# Altium PCB pcb.PcbDoc
Units mm, origin at the board's own origin, x right, y up, seen from the top; angles counter-clockwise.
Board outline 109.47 x 53.98 mm, 2 copper layers (Top Layer, Bottom Layer); 19 components, 21 nets, 91 pads, 5 vias.
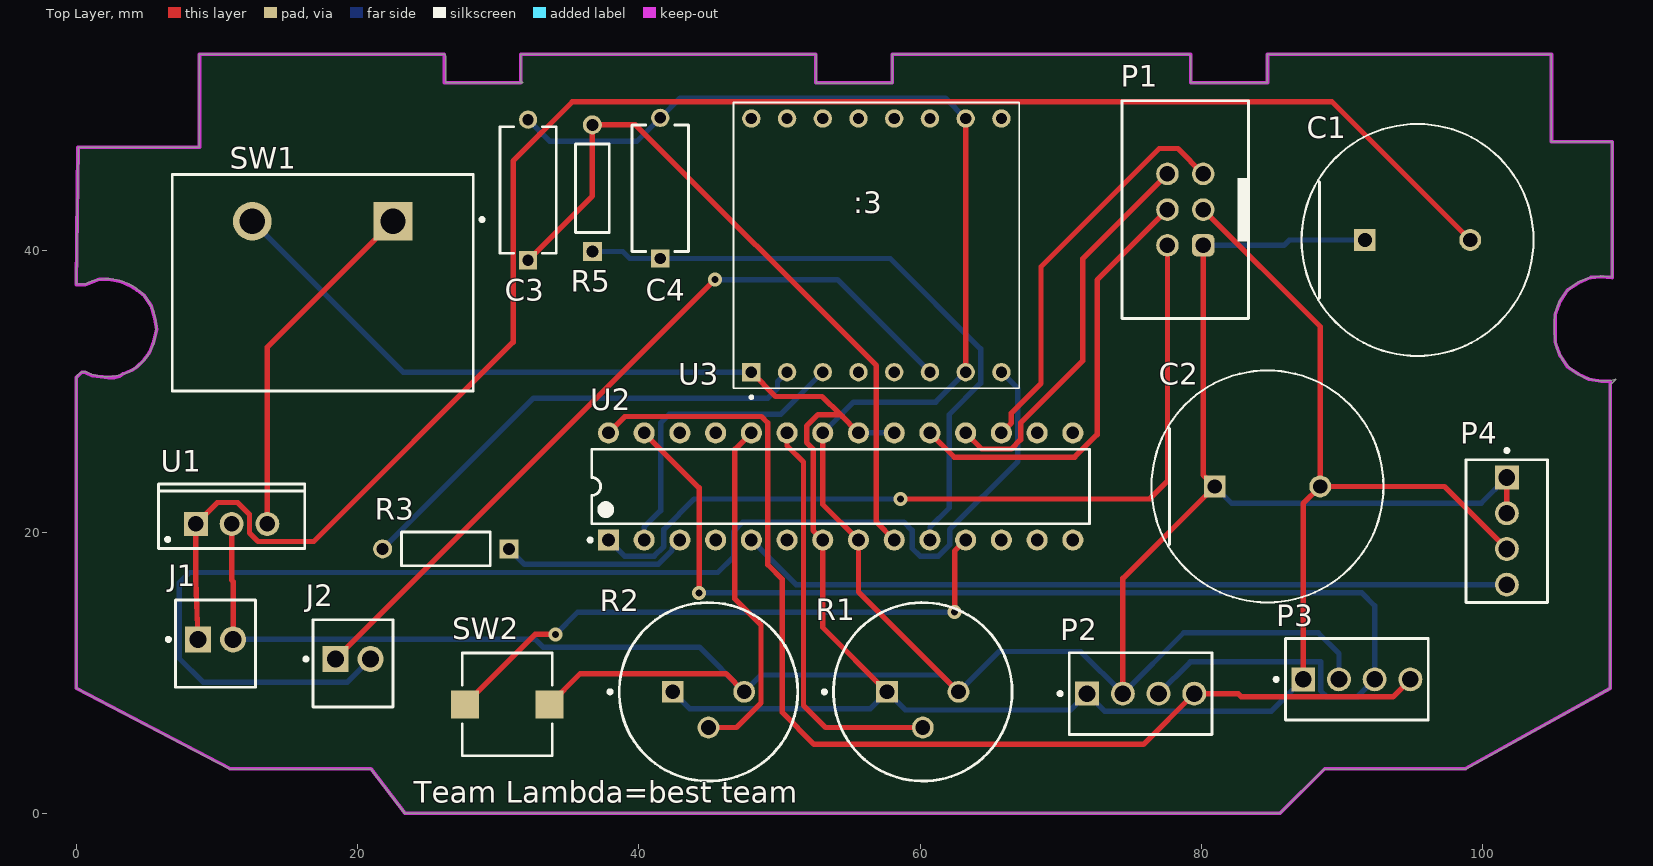
[diagram p0: Top Layer view]
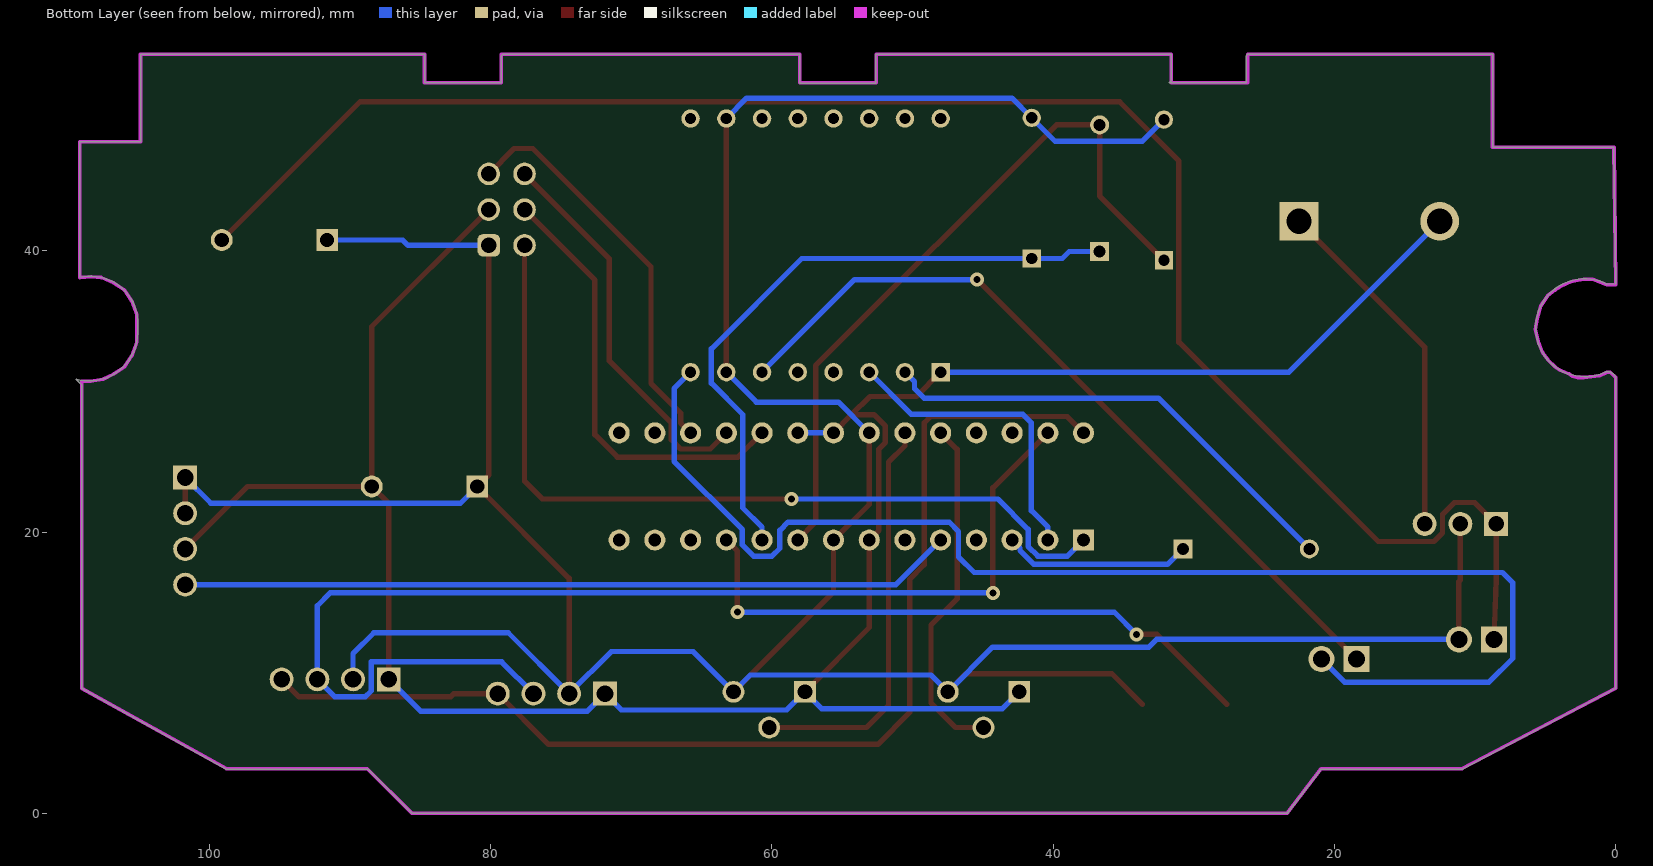
[diagram p1: Bottom Layer view, seen from below]
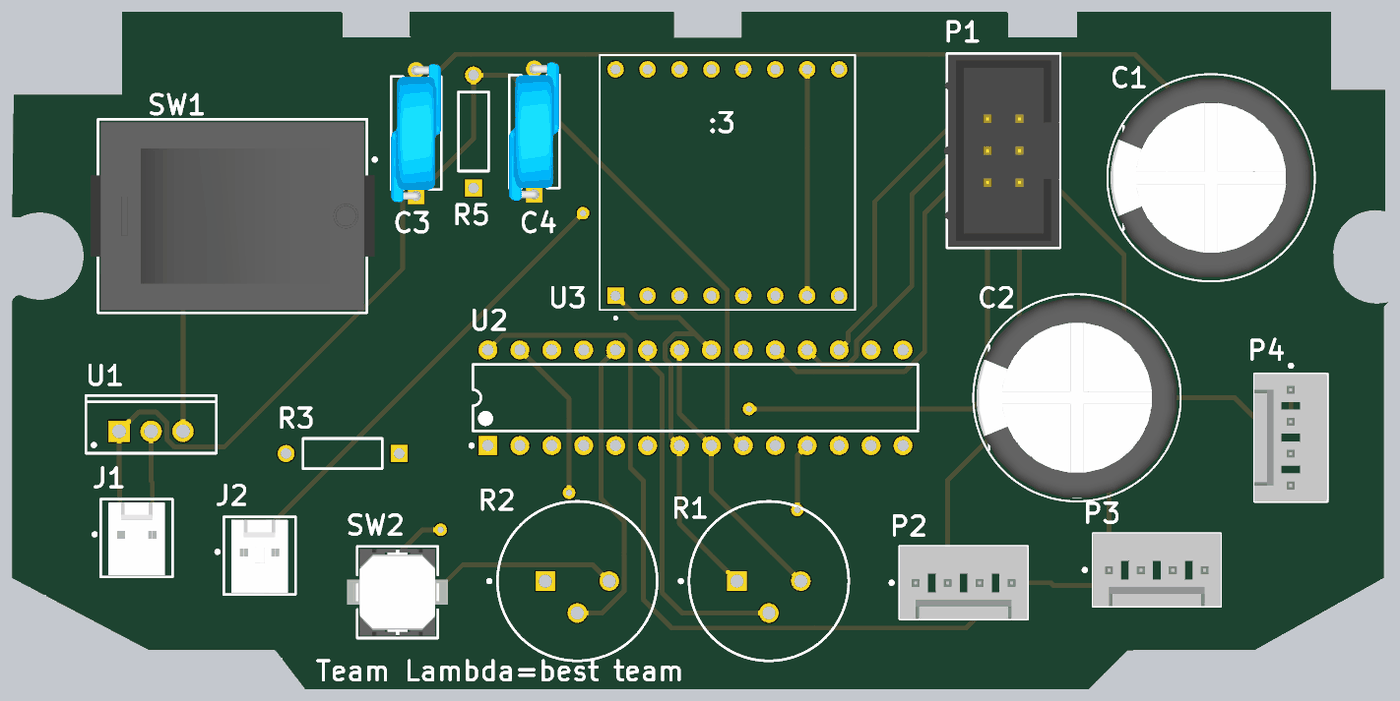
[diagram p2: 3D render of the assembled board from above, using the file's embedded part models]

## Layer stack, top to bottom
Top Solder: solder mask 0.0102, Solder Resist, Dk 3.5
Top Layer: signal copper 0.0356
Dielectric 1: dielectric 0.32, FR-4, Dk 4.8
Bottom Layer: signal copper 0.0356
Bottom Solder: solder mask 0.0102, Solder Resist, Dk 3.5

## Board outline
8.763,47.371 8.763,53.975 26.162,53.975 26.289,53.848 26.289,51.943 31.75,51.943 31.623,52.07 31.623,53.975 52.578,53.975 52.632,53.921 52.632,51.895 57.991,51.895 58.039,51.943 58.039,53.975 79.121,53.975 79.248,53.848 79.248,51.943 84.709,51.943 84.709,53.975 104.902,53.975 104.902,47.752 109.22,47.752 109.22,38.1 ccw(c108.454,34.828) 105.115,34.458 ccw(c108.566,34.201) 109.474,30.861 109.22,30.607 109.093,30.48 109.093,8.89 98.806,3.134 88.732,3.134 85.598,0 23.351,0 20.955,3.134 10.922,3.134 0,8.89 0,29.972 0,30.861 cw(c0.569,30.822) 0.8,31.343 ccw(c2.211,34.524) 0.644,37.631 0.008,37.64 0.127,47.371

## Design rules (kind name [scope] priority, off if disabled: settings)
BoardOutlineClearance [All] p1: gap=0.2 ignorepadtopadclearanceinfootprint=FALSE except(0.4: Arc-SplitBarrior Arc-SplitContinuation Track-SplitBarrior Track-SplitContinuation SMDPad-SplitBarrior SMDPad-SplitContinuation THPad-SplitBarrior THPad-SplitContinuation Via-SplitBarrior Via-SplitContinuation Fill-SplitBarrior Fill-SplitContinuation Poly-SplitBarrior Poly-SplitContinuation Region-SplitBarrior Region-SplitContinuation Text-SplitBarrior Text-SplitContinuation)
Clearance "Clearance Bottom Layer" [OnLayer('Bottom Layer')] p1: gap=0.203 ignorepadtopadclearanceinfootprint=TRUE except(0.254: Arc-Text Track-Text SMDPad-Text THPad-Text Via-Text Fill-Text Poly-Text Region-Text Text-Text)
Clearance "Clearance Top Layer" [OnLayer('Top Layer')] p2: gap=0.203 ignorepadtopadclearanceinfootprint=TRUE except(0.254: Arc-Text Track-Text SMDPad-Text THPad-Text Via-Text Fill-Text Poly-Text Region-Text Text-Text)
Clearance [All] p3: gap=0.2 ignorepadtopadclearanceinfootprint=FALSE except(0.089: Arc-Arc Arc-Track Arc-SMDPad Track-Track Track-SMDPad SMDPad-SMDPad; 0.127: Arc-Via Track-Via SMDPad-Via THPad-Via Via-Via; 0.254: Arc-Text Track-Text SMDPad-Text THPad-Text Via-Text Fill-Text Poly-Text Region-Text Text-Text)
HoleSize [All] p1: absolutevalues=TRUE maxlimit=6.3 minlimit=0.2 maxpercent=80.000 minpercent=20.000
MinimumAnnularRing [All] p1: minimumring=0.076
MinimumSolderMaskSliver [All] p1: minsoldermaskwidth=0.1
PolygonConnect PolygonConnect_1 [All] p1: thpad.connectstyle=Relief thpad.reliefconductorwidth=0.508 thpad.reliefentries=4 thpad.polygonreliefangle="90 Angle" thpad.airgapwidth=0.254 smdpad.connectstyle=Relief smdpad.reliefconductorwidth=0.508 smdpad.reliefentries=4 smdpad.polygonreliefangle="90 Angle" smdpad.airgapwidth=0.254 via.connectstyle=Direct via.reliefconductorwidth=0.508 via.reliefentries=4 via.polygonreliefangle="90 Angle" via.airgapwidth=0.254
RoutingCorners [All] p1: cornerstyle=Round minsetback=2.54 maxsetback=2.54
RoutingVias [All] p1: holewidth=0.5 width=1 viastyle="Through Hole" minholewidth=0.2 minwidth=0.45 maxholewidth=1 maxwidth=2
SilkToSilkClearance [All] p1: silktosilkclearance=0.1
SilkToSolderMaskClearance [IsPad] p1: minsilkscreentomaskgap=0.1 clearancetoexposedcopper=TRUE
SolderMaskExpansion [All] p1: expansion=0.102 istentingtop=FALSE
Width [All] p1: maxlimit=2.54 minlimit=0.089 preferedwidth=0.381
25 further rules are at their usual default settings.

## Components (designator, comment, footprint, x,y, rotation, side; value= is the part's Value field where it differs from the comment)
C1 "10uF" FP-RAD-TH-D_16_0_5-L_15_1-MFG 95.377,40.767 r0 top
C2 "10uF" FP-RAD-TH-D_16_0_5-L_15_1-MFG 84.709,23.241 r0 top
C3 "22 pF" FP-DE1_D9_T4_F10_d0_6-0_0-MFG 32.131,44.323 r90 top
C4 "22 pF" FP-DE1_D9_T4_F10_d0_6-0_0-MFG 41.529,44.45 r90 top
J1 "22-04-1021" FP-22-04-1021-MFG 9.906,12.065 r0 top
J2 "mic" FP-22-04-1021-MFG 19.685,10.668 r0 top
P1 "61200621621" 61200621621 78.867,42.926 r90 top
P2 "accelerometer" MOLX-22-27-2041_V 75.692,8.509 r180 top
P3 "LCD Screen" MOLX-22-27-2041_V 91.059,9.525 r180 top
P4 "reset" MOLX-22-27-2041_V 101.727,20.066 r90 top
R1 "1k Variable" BIT-93PR1KLF 60.198,8.636 r0 top
R2 "1k variable" BIT-93PR1KLF 44.958,8.636 r0 top
R3 "1k" RESA60-630X240 26.289,18.796 r180 top
R5 "external clock" RESA60-630X240 36.703,44.45 r90 top
SW1 "A8L-11-12N1" FP-A8L-11-12N1-MFG 17.526,37.719 r180 top
SW2 "spinny button" FP-B3AL-1003P-MFG 30.655,7.747 r0 top
U1 "L7805CV" TO220 11.049,20.574 r0 top
U2 "ATmega328P-PU" 28P3 54.356,23.241 r90 top
U3 "DFR0299" MODULE_DFR0299 56.896,40.386 r90 top

## Footprints (in the part's own frame and the unit in brackets; to place one, negate y for a bottom-side part, rotate by r counter-clockwise, add the part's x,y. Pads: shape width x height; smd on the part's side, far side on the other; paste and mask are expansions set on the pad)
28P3 [mm] "28-Pin Plastic Dual In-Line Package (PDIP)"
  rect 1.5x1.5 hole 0.9: 1(-3.81,16.51)
  round 1.5 hole 0.9: 2(-3.81,13.97) 3(-3.81,11.43) 4(-3.81,8.89) 5(-3.81,6.35) 6(-3.81,3.81) 7(-3.81,1.27) 8(-3.81,-1.27) 9(-3.81,-3.81) 10(-3.81,-6.35) 11(-3.81,-8.89) 12(-3.81,-11.43) 13(-3.81,-13.97) 14(-3.81,-16.51) 15(3.81,-16.51) 16(3.81,-13.97) 17(3.81,-11.43) 18(3.81,-8.89) 19(3.81,-6.35) 20(3.81,-3.81) 21(3.81,-1.27) 22(3.81,1.27) 23(3.81,3.81) 24(3.81,6.35) 25(3.81,8.89) 26(3.81,11.43) 27(3.81,13.97) 28(3.81,16.51)
  silkscreen extent -3.93,-17.7 2.65,17.93, body extent -3.6,-17.65 3.6,17.65, height 4.58
61200621621 [mm] "6 pins, straight, gold plating"
  rrect50% 1.6x1.6 hole 1.1: 1(-2.54,-1.27)
  round 1.6 hole 1.1: 2(-2.54,1.27) 3(0,-1.27) 4(0,1.27) 5(2.54,-1.27) 6(2.54,1.27)
  silkscreen extent -7.74,-4.5 7.74,4.5, body extent -7.64,-4.43 7.64,4.75, height 9.13
BIT-93PR1KLF [mm] "Through Hole, 3-Leads, Dia 12.7mm"
  rect 1.55x1.55 hole 1.05: 1(-2.54,0)
  round 1.55 hole 1.05: 2(0,-2.54) 3(2.54,0)
  silkscreen extent -7.12,-6.35 6.35,6.35, body extent -6.35,-6.35 6.35,6.35, height 6.35
FP-22-04-1021-MFG [mm]
  rect 1.85x1.85 hole 1.2 paste-2539.97 mask+0: 1(-1.25,0.3)
  round 1.85 hole 1.2 paste-2539.97 mask+0: 2(1.25,0.3)
  silkscreen extent -3.47,-3.1 2.85,3.1, body extent -2.95,-3.2 2.95,3.2, height 0.25
FP-A8L-11-12N1-MFG [mm]
  rect 2.75x2.75 hole 1.8 paste-2539.97 mask+0: 1(-5,-4.375)
  round 2.75 hole 1.8 paste-2539.97 mask+0: 2(5,-4.375)
  silkscreen extent -11.45,-7.7 10.7,7.7, body extent -10.8,-7.8 10.8,7.8, height 0.25
FP-B3AL-1003P-MFG [mm]
  rect 2x2 smd paste+0 mask+0: 1(-3,0) 2(3,0)
  silkscreen extent -3.2,-3.65 3.2,3.65, body extent -4.1,-3.75 4.1,3.75, height 0.25
FP-DE1_D9_T4_F10_d0_6-0_0-MFG [mm]
  rect 1.3x1.3 hole 0.8 paste-2539.97 mask+0: 1(-5,0)
  round 1.3 hole 0.8 paste-2539.97 mask+0: 2(5,0)
  silkscreen extent -4.5,-2 4.5,2, body extent -5.75,-2.1 5.75,2.1, height 0.25
FP-RAD-TH-D_16_0_5-L_15_1-MFG [mm]
  rect 1.55x1.55 hole 1 paste-2539.97 mask+0: 1(-3.75,0)
  round 1.55 hole 1 paste-2539.97 mask+0: 2(3.75,0)
  silkscreen extent -8.25,-8.25 8.25,8.25, body extent -8.35,-8.35 8.35,8.35, height 0.25
MODULE_DFR0299 [mm]
  rect 1.308x1.308 hole 0.8: 1(-9.017,8.89)
  round 1.308 hole 0.8: 2(-9.017,6.35) 3(-9.017,3.81) 4(-9.017,1.27) 5(-9.017,-1.27) 6(-9.017,-3.81) 7(-9.017,-6.35) 8(-9.017,-8.89) 9(9.017,-8.89) 10(9.017,-6.35) 11(9.017,-3.81) 12(9.017,-1.27) 13(9.017,1.27) 14(9.017,3.81) 15(9.017,6.35) 16(9.017,8.89)
  silkscreen extent -10.9,-10.16 10.16,10.16
MOLX-22-27-2041_V [mm] "CONN, 4-Leads, Body 10.16x5.8mm, Pitch 2.54mm"
  rect 1.7x1.7 hole 1.19: 1(3.81,0)
  round 1.7 hole 1.19: 2(1.27,0) 3(-1.27,0) 4(-3.81,0)
  silkscreen extent -5.08,-2.9 5.85,2.9, body extent -5.08,-2.9 5.08,2.9, height 11.7
RESA60-630X240 [mm] "Axial Resistor, 2-Leads, Dia 2.4mm, Body Length 6.3mm"
  rect 1.35x1.35 hole 0.85: 1(-4.5,0)
  round 1.35 hole 0.85: 2(4.5,0)
  silkscreen extent -3.15,-1.2 3.15,1.2, body extent -3.15,-1.2 3.15,1.2, height 2.4
TO220 [mm] "TO, Thru-Hole, Vertical, Heatsink Mounted; 3 In-Line Leads; Pitch 2.54 mm"
  rect 1.7x1.7 hole 1.1: 1(-2.54,0)
  round 1.7 hole 1.1: 2(0,0) 3(2.54,0)
  silkscreen extent -5.2,-1.75 5.2,2.85, body extent -5.25,-1.8 5.25,2.9, height 19.7

## Part data
C1 C2: library part CMP-05427-000770-1, "Aluminum Electrolytic Capacitors (Radial Lead Type) AEC-Q200 Qualified 330uF ±20% 50V", Capacitance=330uF, Case/Package=Radial, Max Operating Temperature=125°C, Min Operating Temperature=-40°C, Package Quantity=100, Ripple Current=1.45A, Tolerance=20%, Voltage Rating=50V, Diameter=16mm, Height=15mm, Lead Diameter=0.8mm, Lead Pitch=7.5mm, Length=15mm, Life (Hours)=2000Hour, Mount="Through Hole", Number of Pins=2, Packaging=Bulk, Radiation Hardening=No, REACH SVHC="No SVHC", RoHS Compliant=Yes, Series=TA, Termination=Radial, Voltage Rating (DC)=50V
C3 C4: library part CMP-06035-032365-1, "Cap Ceramic Disc 2200pF 20% 250VAC Thru-Hole 9.0x4.0x10.0 Ammo pack", Capacitance=2.2nF, Case/Package=Radial, Max Operating Temperature=125°C, Min Operating Temperature=-40°C, Ratings=X1, Tolerance=20%, Voltage Rating=250V, Lead/Base Style=Straight, Mount="Through Hole", Packaging="Cut Tape"
J1 J2: library part CMP-04776-000257-1, "CONN HEADER VERT 2POS 2.5MM", Flammability Rating="UL94 V-0", Insulation Color=Natural, Insulation Resistance=1GR, Package Quantity=1000, Voltage Rating (DC)=250V, Connector Type=Header, Contact Material=Tin, Contact Mating Length=0.295inch, Contact Plating=Tin, Contact Post Length=0.134inch, Contact Shape=Square, Contact Type=-, Fastening Type=Friction, Gender=Male, Glow Wire Compliant=Non-compliant, Halogen Free="Low Halogen", Insulation Height=0.461inch, Insulation Material=Nylon, Lead Free="Lead Free", Mount="Through Hole", Number of Circuits=2, Number of Positions=2, Number of Rows=1, Packaging=Bulk, RoHS Compliant=Yes, Series=5045, Termination="Through Hole", Weight=0.007055oz
P1: "WR-BHD Male Box Header, THT Straight, pitch 2.54mm, 2 row, 6 pin", Contact Resistance=20mOhm, Insulation Resistance=1000MOhm, Manufacturer="Wurth Elektronik", Operating Temperature Max=105°C, Operating Temperature Min=-40°C, Rated Current=3A, Withstanding Voltage=500V, Working Voltage=250V, Category="Wire-to-Board Connectors", ComponentLink1Description="Website Link", ComponentLink1URL=https://www.we-online.com/redexpert/article/61200621621?ad, ComponentLink2Description="Datasheet Link", ComponentLink2URL=https://www.we-online.com/redexpert/spec/61200621621?ad, Gender=Male, Height=9.1mm, Length=15.28mm, Manufacturer Part Number=61200621621, Match Code=WR-BHD, Mount="Through Hole", Number of Pins=6, Number of Rows=2, Orientation=Straight, Packaging=Tray, Pitch=2.54mm, Width=9.1mm
P2 P3 P4: library part CMP-2000-05243-1, "Male Header, Pitch 2.54 mm, 1 x 4 Position, Height 11.7 mm, Tail Length 3.56 mm, RoHS, Bulk", Current Rating=4A, Manufacturer=Molex, Operating Temperature=0degCto+75degC, Voltage Rating=250V, Contact Material=Tinplatedbrass, Datasheet URL=http://www.molex.com/pdm_docs/sd/022272041_sd.pdf, Datasheet Version="Rev. F, 06/2009", Housing Material=Nylon(UL94V-0), Manufacturer URL=http://www.molex.com/
R1 R2: library part CMP-2000-05711-1, "1/2” Diameter Single Turn Cermet Trimming Potentiometer, 1 KOhm, -55 to 125 degC, 3-Pin THD, RoHS, Bulk", Manufacturer="BI Technologies", Operating Temp Range=-55Cto125C, Package Description="3-Pin Through Hole Device, Dia 12.7mm", Package Reference=93PR1KLF, Power Rating=1W, Resistance=1000ohm, Temperature Coefficient=?100ppm/?C, Tolerance (+ or -)=10%, Datasheet URL=https://datasheet.ciiva.com/15760/93-15760960.pdf, Datasheet Version=12/2012, DELETED=Compliant, Failure Rate=NotRequired, Manufacturer URL=http://www.bi-technologies.net/, Military Standard=NotRequired, Mounting Style=ThroughHole, Mounting Technology=ThroughHole, Number of Turns=1Turn, Packaging=Box, Product Depth (mm)=NotRequiredmm, Product Diameter (mm)=12.7mm, Product Height (mm)=6.35mm, Product Length (mm)=NotRequiredmm, Rad Hardened=No, Shaft Diameter (mm)=6.35mm, Technology=Cermet, Termination Style=Pin, Type=Trimmer
R3 R5: library part CMP-1659-00075-1, "Axial Resistor, 1 KOhm, +/- 1%, 250 mW, -55 to 155 degC, 2-Pin THD, RoHS, Bulk", Case\Package=Axial, Max Operating Temperature="155 degC", Min Operating Temperature="-55 degC", Package Quantity=200, Power Rating="250 mW", Resistance="10 kohm", Tolerance=1%, Voltage Rating="250 V", ComponentLink1Description="Manufacturer URL", ComponentLink1URL=http://www.yageo.com/, ComponentLink2Description=Datasheet, ComponentLink2URL=http://www.yageo.com/documents/recent/Yageo%20LR_MFR_2013.pdf, DatasheetVersion=Apr-13, Length="0.248 inch", PackageDescription="2-Pin Axial Lead, Dia 2.4 mm, Body Length 6.3 mm", PackageReference=MFR-25, Packaging=Bulk, RoHSCompliant=true
SW1: library part CMP-08830-000001-1, "SWITCH ROCKER SPST 10A 125V", Current Rating=10A, Max Operating Temperature=55°C, Max Voltage Rating (AC)=250V, Min Operating Temperature=-20°C, Voltage Rating (AC)=125V, Electrical Life=10000Cycles, Mechanical Life=50000Cycles, Mount=Panel, Orientation=Straight, Packaging=Bulk, Radiation Hardening=No, RoHS Compliant=Yes, Switch Function=On-Off, Termination="PC Pins", Throw Configuration=SPST
SW2: library part CMP-08834-000018-1, "SWITCH TACTILE SPST-NO 0.05A 16V", Actuator Color=White, Contact Current Rating=50mA, Contact Resistance=100mR, Max Operating Temperature=90°C, Max Voltage Rating (DC)=16V, Min Operating Temperature=-40°C, Operating Force=3.5N, Package Quantity=1, Contact Plating=Silver, Current Rating=50mA, Depth=6.6mm, Electrical Life=1000000Cycles, Illumination Type=Non-Illuminated, Length=6.9mm, Max Current Rating=50mA, Mechanical Life=1000000Cycles, Mount="Surface Mount", Orientation=Straight, Packaging="Tape and Reel", Radiation Hardening=No, RoHS Compliant=Yes, Series=B3AL, Switch Function=Off-Mom, Switch Travel=1.3mm, Termination=SMD/SMT, Throw Configuration=SPST, Voltage Rating (DC)=16V, Weight=0.18g
U1: library part CMP-0244-00483-1, "Positive Voltage Regulator, 5V, 3-Pin TO-220", ComponentLink1Description="Manufacturer URL", ComponentLink1URL=http://www.st.com, ComponentLink2Description=Datasheet, ComponentLink2URL=http://www.st.com/internet/com/TECHNICAL_RESOURCES/TECHNICAL_LITERATURE/DATASHEET/CD00000444.pdf, ComponentLink3Description="Package Specification", ComponentLink3URL=http://www.st.com/internet/com/TECHNICAL_RESOURCES/TECHNICAL_LITERATURE/PACKAGE_INFORMATION/CD00004649.pdf, DatasheetVersion=16/11/2011, PackageDescription="TO, Thru-Hole, Vertical, Heatsink Mounted; 3 In-Line Leads; Pitch 2.54 mm", PackageReference=TO220, PackageVersion=ver3.0
U2: library part CMP-0095-00013-2, "8-bit AVR Microcontroller, 32KB Flash, 1KB EEPROM, 2KB SRAM, 28-pin PDIP, Industrial Grade (-40°C to 85°C)", ComponentLink1Description="Manufacturer URL", ComponentLink1URL=http://www.atmel.com/, ComponentLink2Description="ATmega48A/48PA/88A/88PA/168A/168PA/328/328P Datasheet", ComponentLink2URL=http://www.atmel.com/dyn/resources/prod_documents/8271.pdf, ComponentLink3Description="ATmega48A/48PA/88A/88PA/168A/168PA/328/328P Summary", ComponentLink3URL=http://www.atmel.com/dyn/resources/prod_documents/8271S.pdf, DatasheetVersion="revD, May-2011", PackageDescription="28-lead (0.300\"/7.62mm Wide) Plastic Dual Inline Package (PDIP)", PackageReference=28P3, PackageVersion="revB, Sep-2001", RevisionNote="DatasheetVersion updated. URLs added."
U3: "Dfplayer - a Mini Mp3 Player", Package=None, Availability=Unavailable, MP=DFR0299, Price=None

## Via types
v1: diameter 1, hole 0.5, Top Layer to Bottom Layer, 5 vias

## Nets (pads, with @x,y where several pads share a name; then routed paths per layer and width w, separated by ;. In a path a pad name is that pad's centre, name@x,y a point inside that pad or via, vN(x,y) a via of type N, cw(c..) or ccw(c..) an arc to the next point about the centre after c; other vN are vias at no path point)
5V: C2.2 P1.3 P2.1 P3.1 P4.3 R1.1 R2.1 SW1.2 U2.7 U2.20 U2.21 U3.1 | length 176.6
  Top Layer w0.381: U3.1 49.733,29.642 53.035,29.642 54.331,28.346 ; U2.21 54.331,28.346 ; R1.1 53.086,13.208 U2.7 52.4,20.117 52.4,25.908 51.942,26.366 51.942,27.533 52.756,28.346 54.331,28.346 ; P1.3 88.459,34.604 C2.2 ; P3.1 87.249,22.031 C2.2 ; P4.3 97.282,23.241 C2.2
  Bottom Layer w0.381: SW1.2 23.251,31.369 U3.1 ; R2.1 43.612,7.442 56.464,7.442 R1.1 58.953,7.341 70.714,7.341 P2.1 73.127,7.264 84.988,7.264 P3.1 ; U2.21 U2.20
7.4V: C1.2 J1.1 U1.1 | length 125.9
  Top Layer w0.381: J1.1 8.509,16.632 U1.1 10.033,22.098 11.481,22.098 12.319,21.26 12.319,19.939 12.929,19.329 16.891,19.329 31.064,33.503 31.064,46.38 35.281,50.597 89.297,50.597 C1.2
GND: C1.1 C2.1 C3.2 C4.2 J1.2 P1.1 P2.2 P3.2 P4.1 P4.2 R1.3 R2.3 SW2.2 U1.2 U2.8 U2.22 U3.7 U3.10 | length 268.5
  Top Layer w0.381: U1.2 11.049,16.592 11.156,16.485 J1.2 ; SW2.2 35.839,9.931 46.203,9.931 R2.3 ; U2.22 53.086,21.971 U2.8 55.626,15.748 R1.3 ; U3.7 U3.10 ; P2.2 74.422,16.704 C2.1 80.137,24.063 P1.1 ; P4.2 P4.1
  Bottom Layer w0.381: J1.2 32.645,12.365 33.199,11.811 44.323,11.811 R2.3 48.692,9.83 61.544,9.83 R1.3 65.608,11.506 71.425,11.506 P2.2 78.753,12.84 88.307,12.84 89.789,11.357 P3.2 ; C3.2 33.677,47.777 39.856,47.777 C4.2 42.93,50.851 61.798,50.851 U3.10 ; U2.22 55.27,29.235 61.112,29.235 U3.7 ; P1.1 85.877,40.386 86.258,40.767 C1.1 ; C2.1 82.153,22.047 99.898,22.047 P4.1
NetC3_1: C3.1 R5.2 U2.9 | length 51.7
  Top Layer w0.381: C3.1 36.703,43.895 R5.2 39.772,48.95 56.896,31.826 56.896,20.701 U2.9
NetC4_1: C4.1 R5.1 U2.10 | length 45.6
  Bottom Layer w0.381: R5.1 38.862,39.95 39.362,39.45 C4.1 57.883,39.45 64.313,33.02 64.313,30.582 62.078,28.346 62.078,21.718 60.706,20.347 U2.10
NetJ2_1: J2.1 U3.6 | length 56.2
  Top Layer w0.381: J2.1 v1(45.415,37.948)
  Bottom Layer w0.381: v1(45.415,37.948) 54.127,37.948 U3.6
NetJ2_2: J2.2 U3.8 | length 94.9
  Bottom Layer w0.381: J2.2 19.289,9.322 9.017,9.322 7.315,11.024 7.315,16.383 8.051,17.119 45.618,17.119 46.736,18.237 46.736,20.041 47.396,20.701 58.852,20.701 59.436,20.117 59.436,18.847 59.996,18.287 61.316,18.287 62.102,19.074 62.102,20.168 66.954,25.02 66.954,30.201 U3.8
NetP1_2: P1.2 U2.1 | length 59.9
  Top Layer w0.381: v1(58.623,22.352) 76.327,22.352 77.597,23.622 P1.2
  Bottom Layer w0.381: U2.1 38.99,18.287 41.096,18.287 41.782,18.973 41.782,20.192 43.942,22.352 v1(58.623,22.352)
NetP1_4: P1.4 U2.19 | length 31.3
  Top Layer w0.381: U2.19 62.434,25.323 70.992,25.323 72.593,26.924 72.593,37.922 P1.4
NetP1_5: P1.5 U2.17 | length 28.7
  Top Layer w0.381: U2.17 66.5,27.765 66.5,28.453 68.605,30.558 68.605,38.862 77.013,47.269 78.334,47.269 P1.5
NetP1_6: P1.6 U2.18 | length 27.9
  Top Layer w0.381: U2.18 64.39,25.907 66.496,25.907 67.158,26.568 67.158,27.762 71.577,32.182 71.577,39.446 P1.6
NetP2_3: P2.3 P3.3 U2.27 | length 85.7
  Top Layer w0.381: U2.27 44.298,23.139 v1(44.298,15.672)
  Bottom Layer w0.381: v1(44.298,15.672) 91.415,15.672 92.329,14.757 P3.3 91.084,8.28 88.925,8.28 88.494,8.712 88.494,10.769 79.222,10.769 P2.3
NetP2_4: P2.4 P3.4 U2.28 | length 80.7
  Top Layer w0.381: U2.28 39.014,28.219 48.717,28.219 49.174,27.762 49.174,17.678 50.216,16.637 50.216,7.163 52.476,4.902 75.895,4.902 P2.4 82.626,8.509 82.855,8.28 93.624,8.28 P3.4
NetP4_4: P4.4 U2.5 | length 55
  Bottom Layer w0.381: U2.5 51.181,16.256 P4.4
NetR1_2: R1.2 U2.23 | length 29
  Top Layer w0.381: U2.23 50.546,26.135 51.714,24.967 51.714,7.673 53.291,6.096 R1.2
NetR2_2: R2.2 U2.24 | length 24.9
  Top Layer w0.381: R2.2 46.939,6.096 48.692,7.849 48.692,13.386 46.838,15.24 46.838,25.883 U2.24
NetR3_1: R3.1 U2.3 | length 13.4
  Bottom Layer w0.381: R3.1 31.882,17.703 41.377,17.703 42.364,18.69 42.364,18.869 U2.3
NetR3_2: R3.2 U3.2 | length 34.3
  Bottom Layer w0.381: R3.2 32.515,29.522 49.189,29.522 49.868,30.201 49.868,30.691 U3.2
NetSW1_1: SW1.1 U1.3 | length 25.2
  Top Layer w0.381: U1.3 13.589,33.157 SW1.1
NetSW2_1: SW2.1 U2.11 | length 43
  Top Layer w0.381: SW2.1 32.633,12.725 v1(34.087,12.725) ; v1(62.459,14.3) 62.459,18.644 U2.11
  Bottom Layer w0.381: v1(34.087,12.725) 35.662,14.3 v1(62.459,14.3)
NetU2_2: U2.2 U3.3 | length 21.8
  Bottom Layer w0.381: U2.2 40.386,20.347 41.554,21.515 41.554,27.762 42.164,28.372 50.089,28.372 U3.3
pads on no net: U2.4 U2.6 U2.12 U2.13 U2.14 U2.15 U2.16 U2.25 U2.26 U3.4 U3.5 U3.9 U3.11 U3.12 U3.13 U3.14 U3.15 U3.16

## Keep-outs
Keep-Out Layer:
  lines w0.254: 0,8.89 10.922,3.175 20.955,3.175 23.368,0 85.598,0 88.773,3.175 98.806,3.175 109.093,8.89 109.093,30.734 108.458,30.734 107.569,30.861 106.807,31.242 106.045,31.75 105.537,32.512 105.156,33.528 105.156,34.417 105.156,35.433 105.537,36.449 106.045,37.211 106.807,37.719 107.696,38.1 108.391,38.156 109.22,38.1 109.22,47.752 104.902,47.752 104.902,53.975 84.709,53.975 84.709,51.943 79.248,51.943 79.248,53.975 58.039,53.975 58.039,51.943 52.578,51.943 52.578,53.975 31.623,53.975 31.623,51.943 26.162,51.943 26.162,53.975 8.763,53.975 8.763,47.371 0.127,47.371 0,37.592 0.635,37.592 1.651,37.973 2.286,37.973 3.048,37.846 3.683,37.592 4.318,37.211 4.826,36.83 5.334,36.068 5.588,35.179 5.715,34.417 5.461,33.401 5.207,32.766 4.826,32.258 4.318,31.75 3.937,31.496 3.302,31.242 cw(c2.689,31.855) 2.689,30.988 2.286,30.988 1.143,31.115 0.635,31.369 0.381,31.369 0,30.988 0,8.89

## Silkscreen, mask and mechanical layers (free items; w line width, h text height)
Top Overlay:
  text ":3" at 55.245,42.672 h1.52
  text "Team Lambda=best team" at 24.003,0.762 h1.52